# Altium PCB Motherboard_PCB.PcbDoc
Units mm, origin at the board's own origin, x right, y up, seen from the top; angles counter-clockwise.
Board outline 135 x 101.98 mm, 4 copper layers (Top Layer, Ground, Power, Bottom Layer), stack 0.603 mm thick; 12 components, 57 nets, 161 pads, 18 vias.
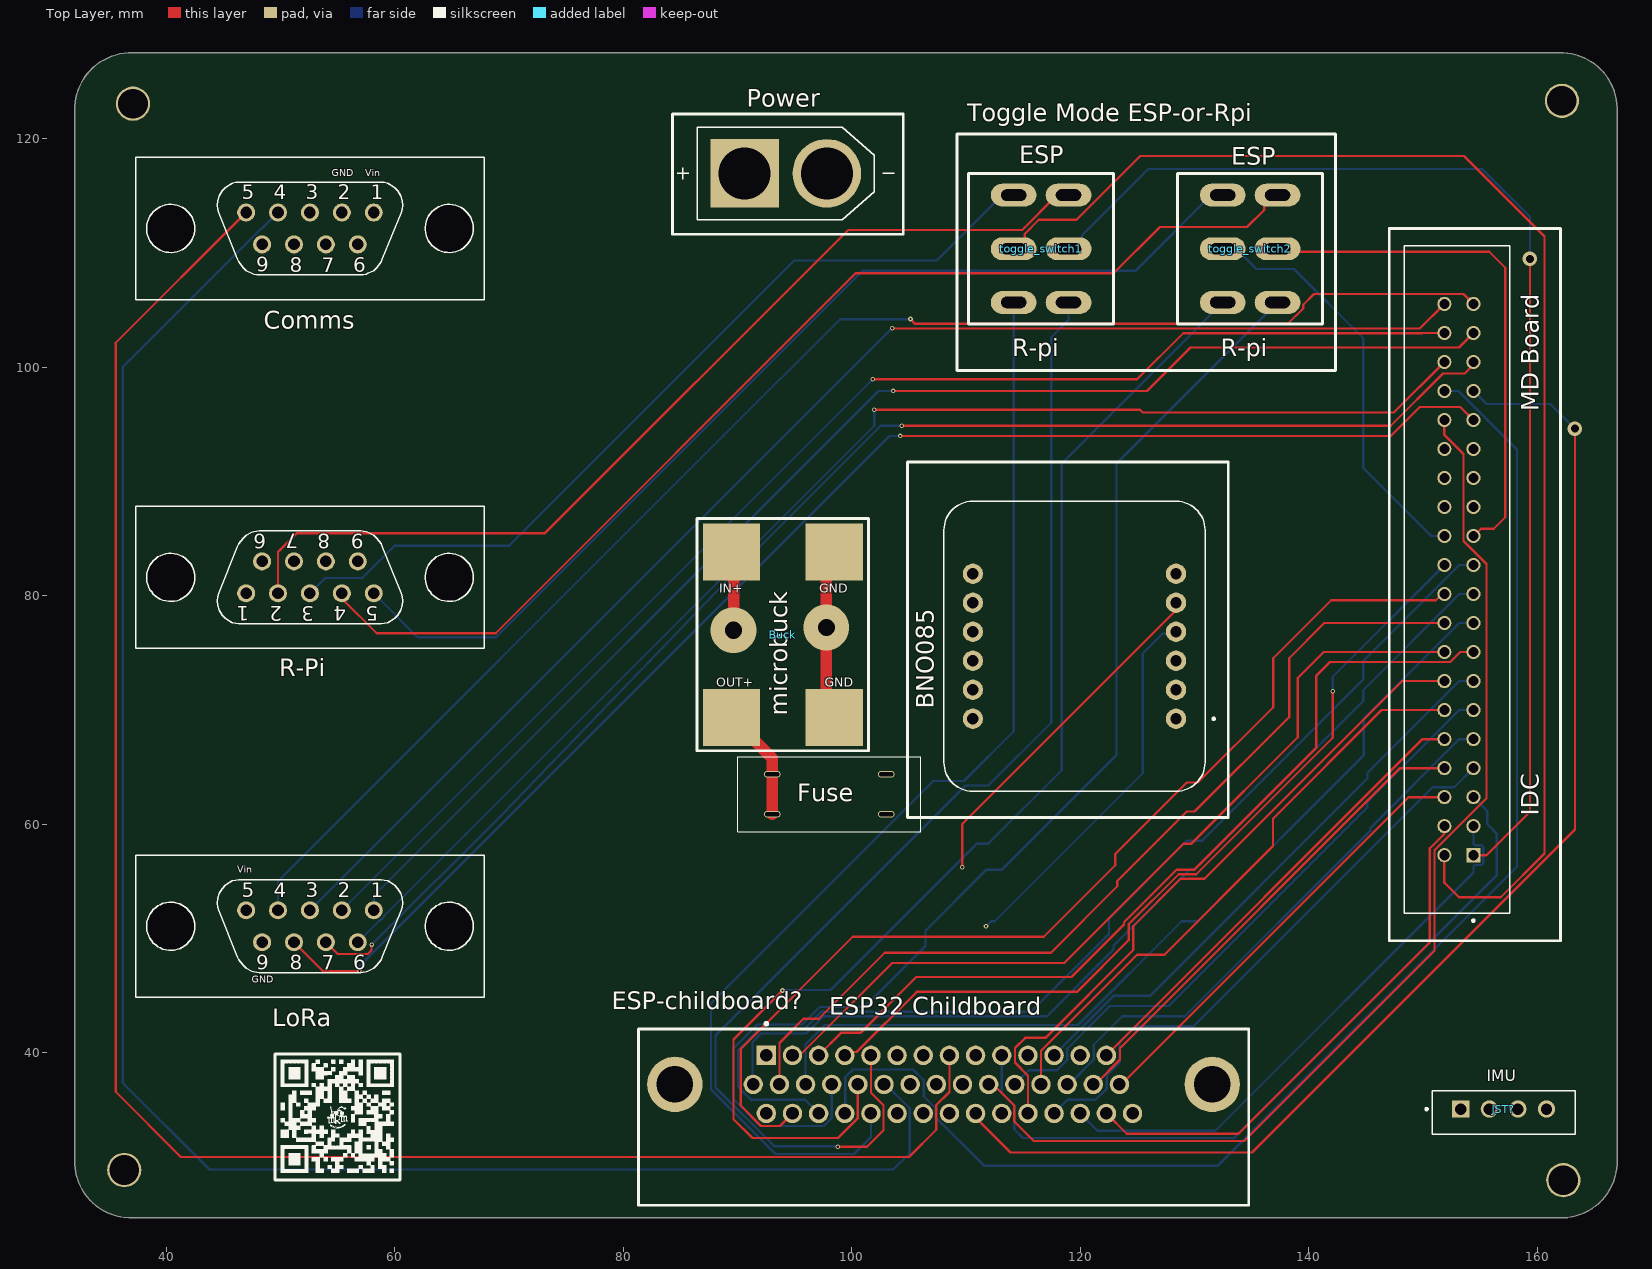
[diagram p0: Top Layer view]
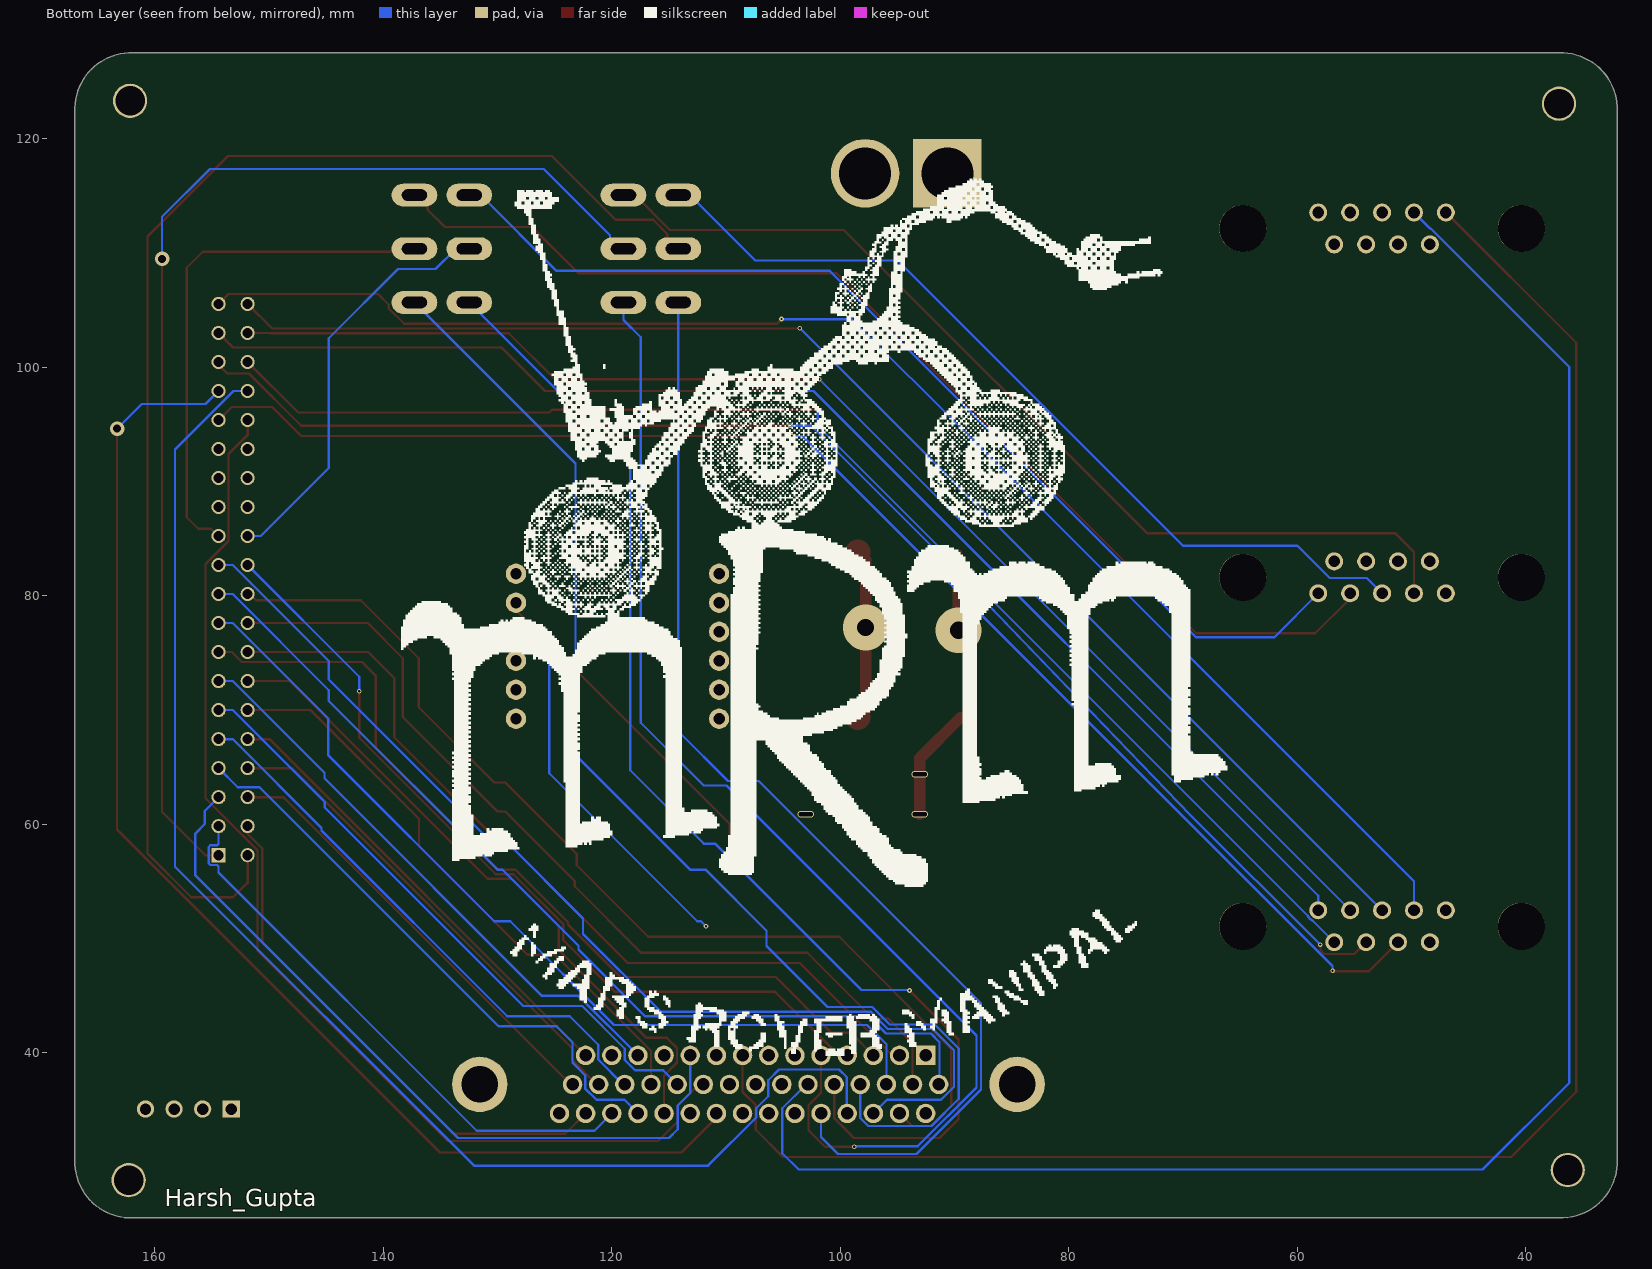
[diagram p1: Bottom Layer view, seen from below]
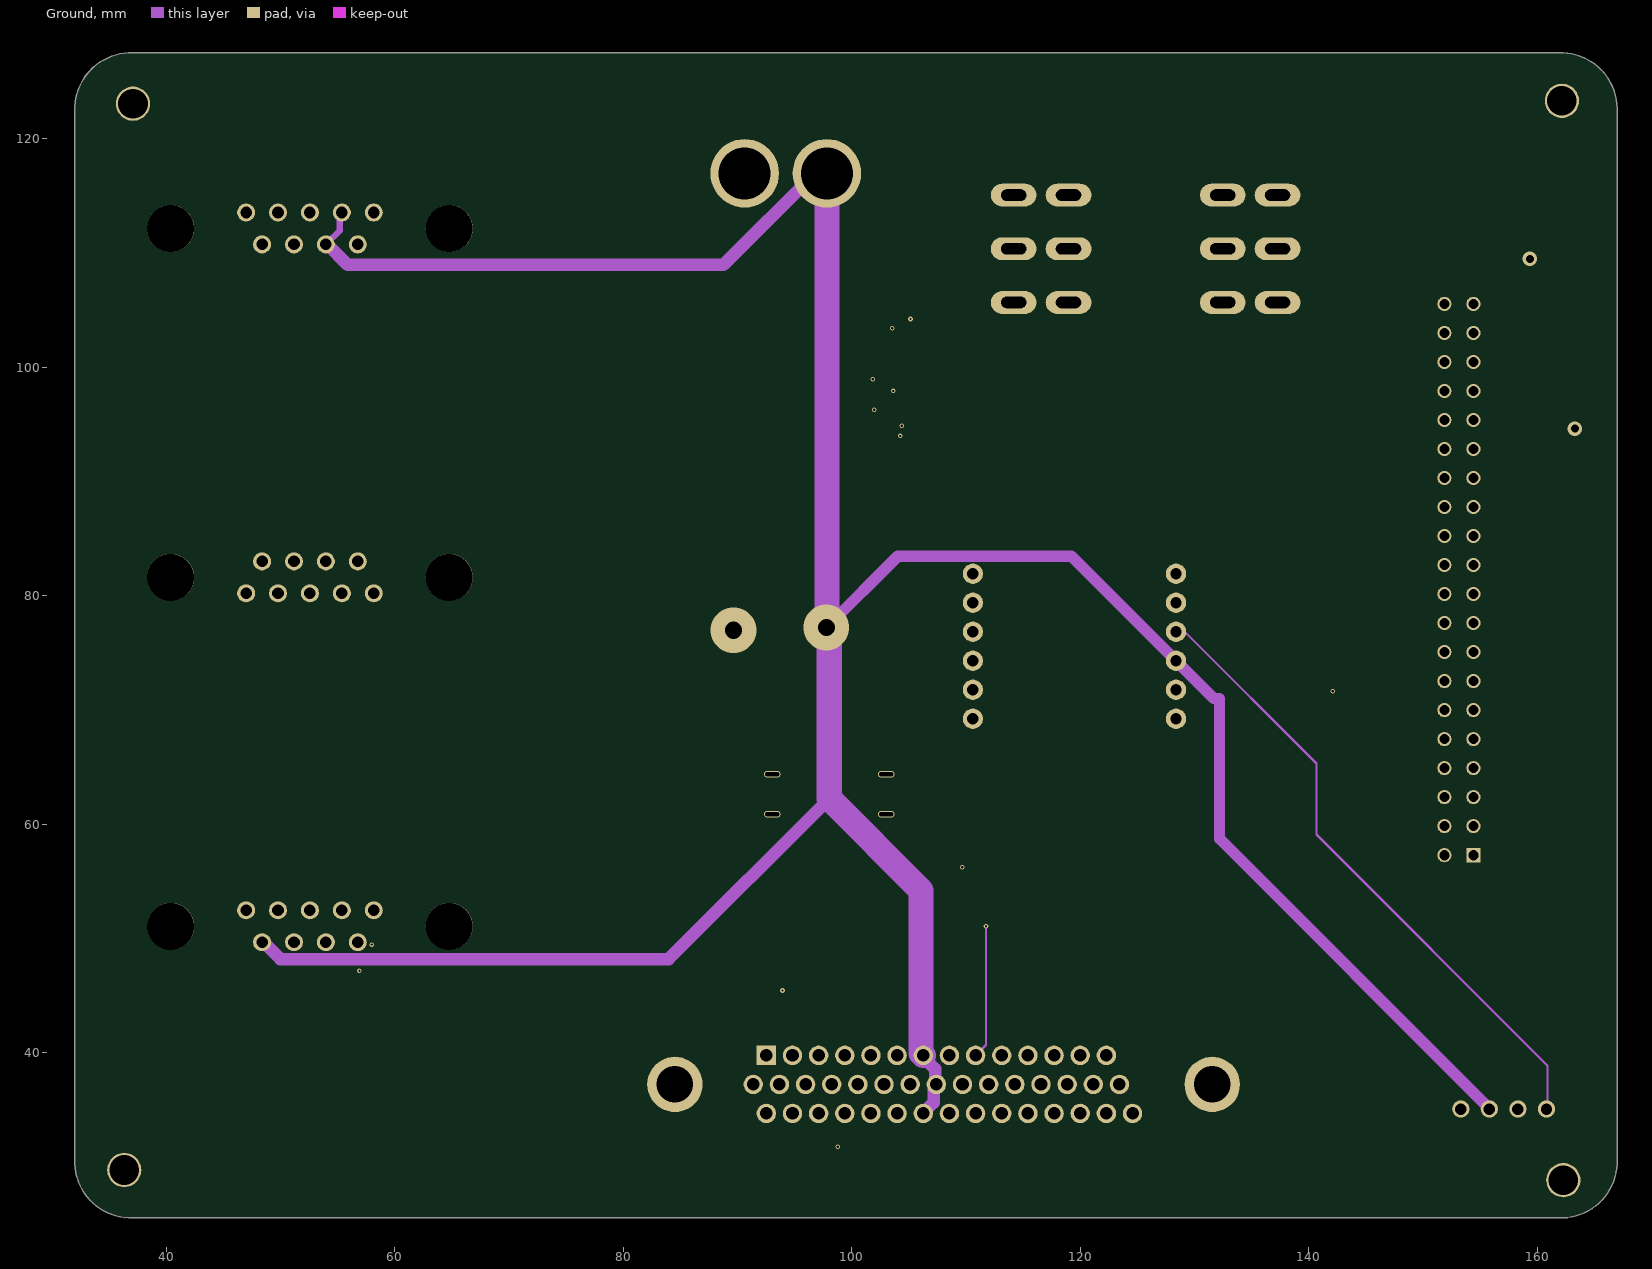
[diagram p2: Ground]
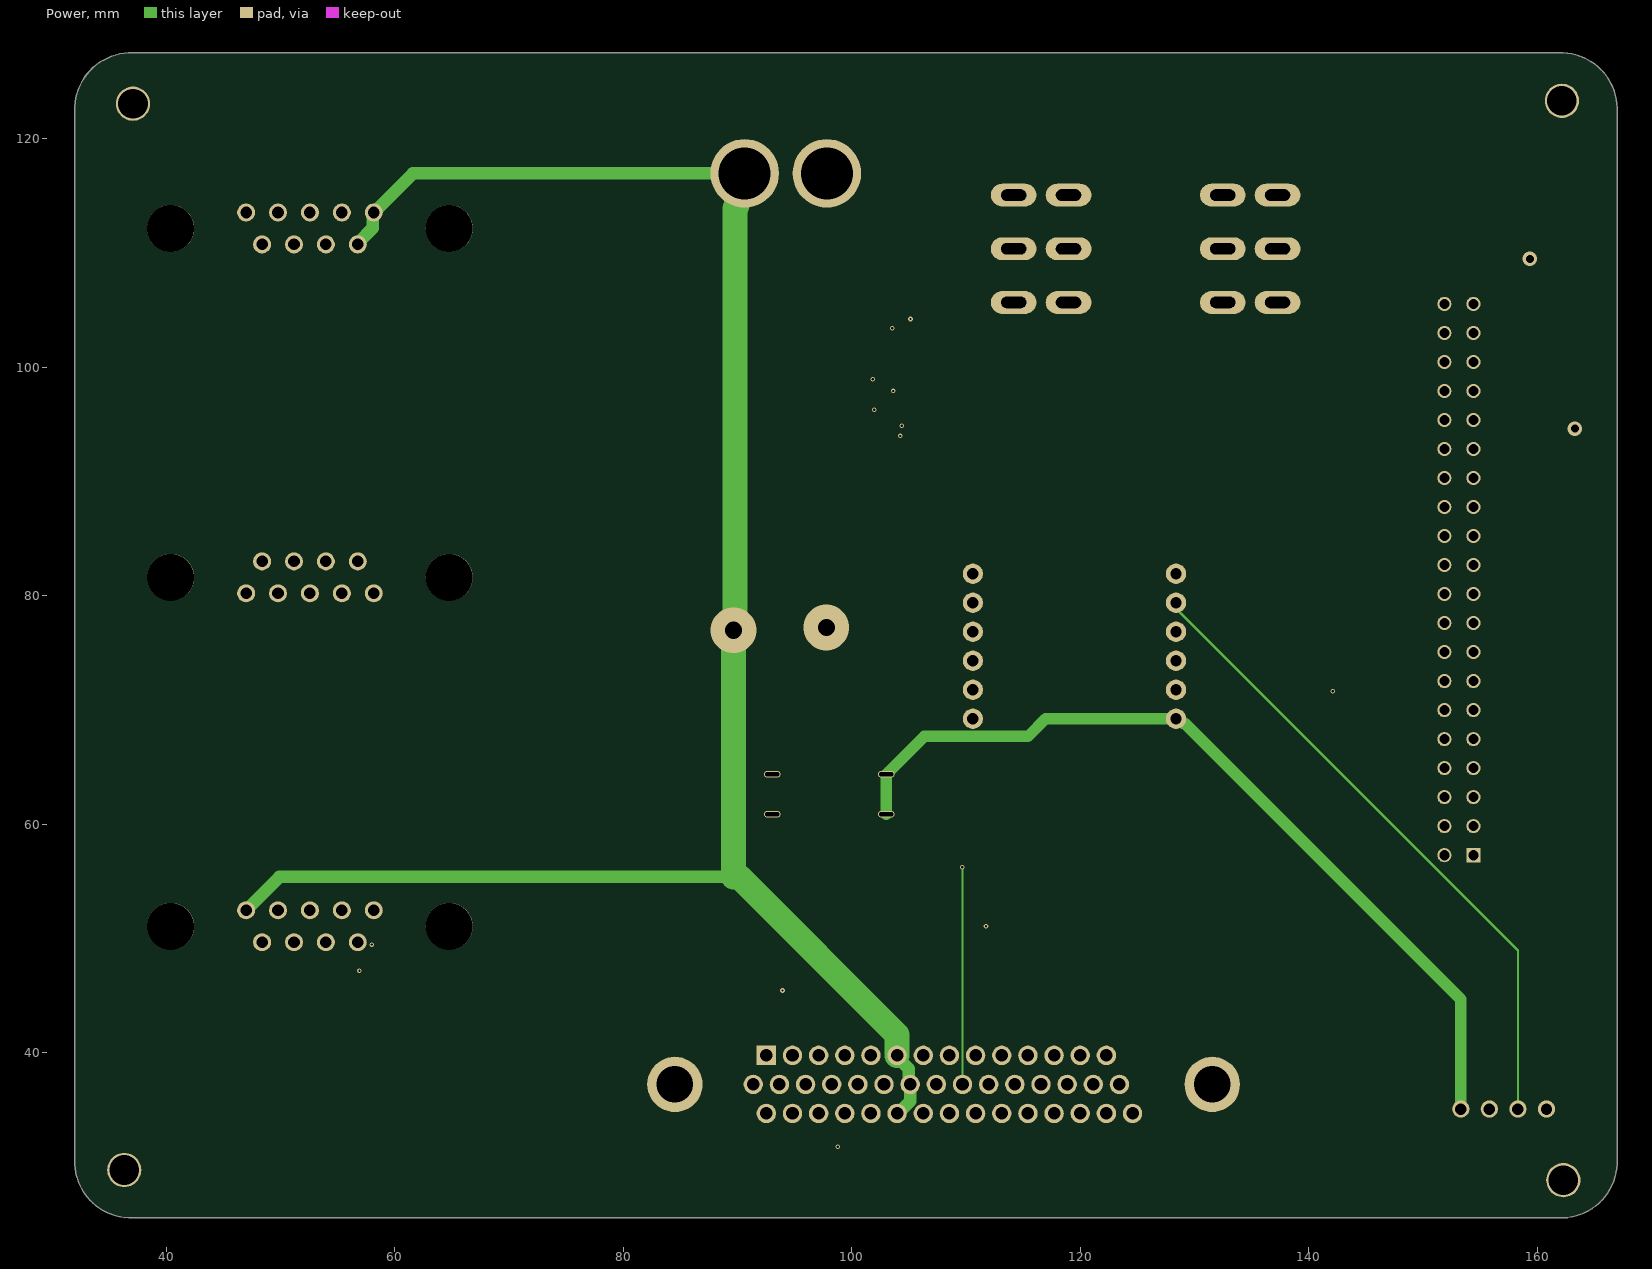
[diagram p3: Power]

## Layer stack, top to bottom
Top Solder: solder mask 0.0102, Solder Resist, Dk 3.5
Top Layer: signal copper 0.0356
Dielectric 2: prepreg 0.0711, PP-006, Dk 4.1
Ground: signal copper 0.035
Dielectric 1: dielectric 0.32, FR-4, Dk 4.8
Power: signal copper 0.035
Dielectric 3: prepreg 0.0711, PP-006, Dk 4.1
Bottom Layer: signal copper 0.0356
Bottom Solder: solder mask 0.0102, Solder Resist, Dk 3.5

## Board outline
32.004,30.228 ccw(c36.893,30.416) 36.708,25.527 36.711,25.527 161.931,25.527 162.309,25.527 ccw(c162.121,30.416) 167.009,30.194 167.005,30.226 167.005,122.422 167.005,122.682 167.007,122.708 ccw(c162.115,122.618) 162.301,127.508 37.084,127.508 37.078,127.508 ccw(c36.893,122.619) 32.004,122.807 32.004,30.607

## Design rules (kind name [scope] priority, off if disabled: settings)
Clearance [All] p1: gap=0.254 ignorepadtopadclearanceinfootprint=FALSE except(0.15: Arc-THPad Track-THPad; 0.2: Arc-Arc Arc-Track Arc-SMDPad Track-Track Track-SMDPad)
DiffPairsRouting [All] p1: maxlimit=0.254 minlimit=0.2 mostfreqgap=0.254 toplayer_minwidth=0.381 toplayer_maxwidth=0.381 toplayer_prefwidth=0.381 midlayer1_minwidth=0.381 midlayer1_maxwidth=0.381 midlayer1_prefwidth=0.381 midlayer2_minwidth=0.381 midlayer2_maxwidth=0.381 midlayer2_prefwidth=0.381 bottomlayer_minwidth=0.381 bottomlayer_maxwidth=0.381 bottomlayer_prefwidth=0.381 maxuncoupledlength=12.7
PolygonConnect [All] p1: connectstyle=Relief reliefconductorwidth=0.254 reliefentries=4 polygonreliefangle="90 Angle" airgapwidth=0.254
RoutingVias [All] p1: holewidth=0.711 width=1.27 viastyle="Through Hole" minholewidth=0.711 minwidth=1.27 maxholewidth=0.711 maxwidth=1.27
SolderMaskExpansion [All] p1: expansion=0.102 istentingtop=FALSE
SupplyNets "Schematic Supply Nets_1" [InNet('+12')] p1: voltage=0.000
SupplyNets "Schematic Supply Nets" [InNet('GND')] p2: voltage=0.000
Width [All] p1: maxlimit=4 minlimit=0.2 preferedwidth=0.254 toplayer_maxwidth=3 bottomlayer_maxwidth=0.3 minimp=50.000000 maximp=50.000000 favimp=50.000000
29 further rules are at their usual default settings.

## Components (designator, comment, footprint, x,y, rotation, side; value= is the part's Value field where it differs from the comment)
BNO085 "4754" MODULE_4754 119.507,75.565 r90 top
Buck "Microbuck" "Micro buck" 93.98,76.581 r0 top
Comms "DB9F" D-09F 52.578,112.141 r0 top
ESP-childboard? "L717HDB44PD1CH4F" PCBComponent_1 109.093,29.21 r0 top
Fuse "MicroBladeFuseHolder" Fuse 98.044,62.611 r90 top
IDC "3-1761603-3" TE_3-1761603-3 154.432,57.277 r90 top
JST? "IMU" JST_B4B-EH-A 157.079,35.052 r0 top
LoRa "DB9F" D-09F 52.578,51.054 r0 top
Power "XT60-M" AMASS_XT60-M 94.234,116.967 r0 top
R-Pi "DB9F" D-09F 52.578,81.597 r180 top
toggle_switch1 "toggle switch" "toggle switch" 116.586,110.363 r180 top
toggle_switch2 "toggle switch" "toggle switch" 134.887,110.363 r180 top

## Footprints (in the part's own frame and the unit in brackets; to place one, negate y for a bottom-side part, rotate by r counter-clockwise, add the part's x,y. Pads: shape width x height; smd on the part's side, far side on the other; paste and mask are expansions set on the pad)
AMASS_XT60-M [mm]
  round 6 hole 4.55: N(3.6,0)
  rect 6x6 / inner round 6 / far side rect 6x6 hole 4.55: P(-3.6,0)
  silkscreen extent -9.5,-4.05 9.5,4.05, body extent -7.75,-4.05 7.75,4.05, height 16
D-09F [mil]
  round 62 hole 40: 1(220,55) 2(110,55) 3(0,55) 4(-110,55) 5(-220,55) 6(165,-55) 7(55,-55) 8(-55,-55) 9(-165,-55)
  round 162 hole 162 unplated: ""(-480,0) ""(480,0)
  silkscreen extent -600,-245 600,245
Fuse [mm] "MicroBladeFuseHolder"
  oval 0.55x1.455 hole 0.35 slot 1.255 at 90 deg: 0(-1.75,4.988) 0(1.75,4.988) 1(-1.75,-4.988) 1(1.75,-4.988)
  silkscreen extent -3.27,-8 3.27,8
JST_B4B-EH-A [mm]
  rect 1.508x1.508 / inner round 1.508 / far side rect 1.508x1.508 hole 1: 1(-3.75,0)
  round 1.508 hole 1: 2(-1.25,0) 3(1.25,0) 4(3.75,0)
  silkscreen extent -6.85,-2.2 6.25,1.6, body extent -6.25,-2.2 6.25,1.6, height 6
"Micro buck" [mm]
  rect 5x5 smd: 1(-4.5,7.25) 2(4.5,7.25) 3(-4.5,-7.25) 4(4.5,-7.25)
  silkscreen extent -7.5,-10.16 7.5,10.16
MODULE_4754 [mil]
  round 70 hole 39.37: JP1_1(-250,-350) JP1_2(-150,-350) JP1_3(-50,-350) JP1_4(50,-350) JP1_5(150,-350) JP1_6(250,-350) JP2_1(-250,350) JP2_2(-150,350) JP2_3(-50,350) JP2_4(50,350) JP2_5(150,350) JP2_6(250,350)
  silkscreen extent -500,-483 500,450
PCBComponent_1 [mm]
  rect 1.7x1.7 hole 1.1 paste-2539.97 mask+0: 1(-16.562,10.541)
  round 1.7 hole 1.1 paste-2539.97 mask+0: 2(-14.272,10.541) 3(-11.982,10.541) 4(-9.692,10.541) 5(-7.402,10.541) 6(-5.112,10.541) 7(-2.822,10.541) 8(-0.532,10.541) 9(1.758,10.541) 10(4.048,10.541) 11(6.338,10.541) 12(8.628,10.541) 13(10.918,10.541) 14(13.208,10.541) 15(15.498,5.461) 16(-17.707,8.001) 17(-15.417,8.001) 18(-13.127,8.001) 19(-10.837,8.001) 20(-8.547,8.001) 21(-6.257,8.001) 22(-3.967,8.001) 23(-1.677,8.001) 24(0.613,8.001) 25(2.903,8.001) 26(5.193,8.001) 27(7.483,8.001) 28(9.773,8.001) 29(12.063,8.001) 30(14.353,8.001) 31(-16.562,5.461) 32(-14.272,5.461) 33(-11.982,5.461) 34(-9.692,5.461) 35(-7.402,5.461) 36(-5.112,5.461) 37(-2.822,5.461) 38(-0.532,5.461) 39(1.758,5.461) 40(4.048,5.461) 41(6.338,5.461) 42(8.628,5.461) 43(10.918,5.461) 44(13.208,5.461)
  round 4.85 hole 3.2 paste-2539.97 mask+0: 45(-24.562,8.001) 46(22.478,8.001)
  silkscreen extent -27.75,-2.58 25.67,13.44, body extent -27.85,-9.72 25.77,12.96, height 0.25
TE_3-1761603-3 [mm]
  rect 1.24x1.24 hole 0.89: 1(0,0)
  round 1.24 hole 0.89: 2(0,2.54) 3(2.54,0) 4(2.54,2.54) 5(5.08,0) 6(5.08,2.54) 7(7.62,0) 8(7.62,2.54) 9(10.16,0) 10(10.16,2.54) 11(12.7,0) 12(12.7,2.54) 13(15.24,0) 14(15.24,2.54) 15(17.78,0) 16(17.78,2.54) 17(20.32,0) 18(20.32,2.54) 19(22.86,0) 20(22.86,2.54) 21(25.4,0) 22(25.4,2.54) 23(27.94,0) 24(27.94,2.54) 25(30.48,0) 26(30.48,2.54) 27(33.02,0) 28(33.02,2.54) 29(35.56,0) 30(35.56,2.54) 31(38.1,0) 32(38.1,2.54) 33(40.64,0) 34(40.64,2.54) 35(43.18,0) 36(43.18,2.54) 37(45.72,0) 38(45.72,2.54) 39(48.26,0) 40(48.26,2.54)
  silkscreen extent -5.83,-3.18 53.34,6.04
"toggle switch" [mm]
  oval 4x2 hole 1 slot 2.2 at 0 deg: 1(-2.4,4.7) 2(-2.4,0) 3(-2.4,-4.7) 4(2.4,4.7) 5(2.4,0) 6(2.4,-4.7)
  silkscreen extent -6.35,-6.6 6.35,6.6

## Part data
BNO085: "Adafruit 9-DOF Orientation IMU Fusion Breakout - BNO085 (BNO080) - STEMMA QT / Qwiic", Package=None, Availability="In Stock", Check_prices=https://www.snapeda.com/parts/4754/Adafruit+Industries/view-part/?ref=eda, MF=Adafruit, MP=4754, Price=None, Purchase-URL=https://pricing.snapeda.com/search/part/4754/?ref=eda, SnapEDA_Link=https://www.snapeda.com/parts/4754/Adafruit+Industries/view-part/?ref=snap
Buck: library part microbuck
Comms LoRa R-Pi: "Adapter Connector D-Sub, 9 Pin Female To Modular, Female Jack, 8p8c _RJ45_ Beige", Package=None, Availability=Unavailable, MF="Assmann WSW", MP=DB9F, Price=None, SnapEDA_Link=https://www.snapeda.com/parts/DB9F/Assmann%20WSW%20Components/view-part/558712/?ref=snap
ESP-childboard?: library part CMP-02362-000001-1, "CONN DSUB HD PLUG 44POS R/A SLDR", Current Rating=3A, Max Operating Temperature=105°C, Min Operating Temperature=-55°C, Package Quantity=50, Voltage Rating=250V, Body Material=Steel, Connector Type=D-Sub, Contact Material=Brass, Contact Plating=Gold, Depth=22.22mm, Gender=Male, Housing Material=Thermoplastic, Length=53.09mm, Mount="Through Hole", Number of Contacts=44, Number of Ports=1, Number of Positions=44, Number of Rows=3, Number of Terminals=44, Orientation="Right Angle", Packaging=Tray, Termination=Solder, Width=12.55mm
IDC: "AMP-LATCH 40 Position 2.54 mm Dual Row Through-Hole Straight Pin Header", Package=None, Availability=Unavailable, Centerline_Pitch="2.54 mm[.1 in]", DigiKey-Purchase-URL=https://snapeda.com/shop?store=DigiKey&id=379325, EU_RoHS_Compliance=Compliant, MF="TE Connectivity", MP=3-1761603-3, Number_of_Positions=40, Price=None, Product_Type=Connector, SnapEDA_Link=https://www.snapeda.com/parts/3-1761603-3/TE%20Connectivity%20AMP%20Connectors/view-part/379325/?ref=snap
JST?: library part B4B-EH-A, "Connector Header Through Hole 4 position 0.098 (2.50mm)", Package=None, Check_prices=https://www.snapeda.com/parts/B4B-EH-A/JST/view-part/?ref=eda, MF=JST, MP=B4B-EH-A, SnapEDA_Link=https://www.snapeda.com/parts/B4B-EH-A/JST/view-part/?ref=snap
Power: "Plug; DC supply; XT60; male; PIN: 2; for cable; soldered; 30A; 500V", Package=Package, Check_prices=https://www.snapeda.com/parts/XT60-M/AMASS/view-part/?ref=eda, MF=AMASS, MP=XT60-M, SnapEDA_Link=https://www.snapeda.com/parts/XT60-M/AMASS/view-part/?ref=snap

## Free pads (board coordinates)
  round 3 hole 2.6: 1(162.306,28.829) 3(36.322,29.718) 3(37.084,123.063) 3(162.179,123.317)

## Via types
v1: diameter 0.4, hole 0.2, Top Layer to Bottom Layer, 14 vias
v2: diameter 4, hole 1.5, Top Layer to Bottom Layer, 2 vias
v3: diameter 1.27, hole 0.711, Top Layer to Bottom Layer, 2 vias

## Nets (pads, with @x,y where several pads share a name; then routed paths per layer and width w, separated by ;. In a path a pad name is that pad's centre, name@x,y a point inside that pad or via, vN(x,y) a via of type N, cw(c..) or ccw(c..) an arc to the next point about the centre after c; other vN are vias at no path point)
+12: Buck.1 Comms.1 Comms.6 ESP-childboard?.6 ESP-childboard?.22 ESP-childboard?.36 LoRa.5 Power.P | length 178.4
  Top Layer w0.3: Buck.1 Buck.1@90.17,83.141
  Top Layer w1: v2(89.662,76.962) 89.662,82.633 Buck.1@90.17,83.141
  Power w1.1: LoRa.5 49.911,55.372 90.17,55.372 ; Comms.6 56.769,110.872 58.075,112.179 58.075,113.447 Comms.1 61.595,116.967 Power.P ; ESP-childboard?.36 104.079,34.671 105.126,35.718 ESP-childboard?.22 105.011,37.326 105.011,38.558 103.981,39.589 ESP-childboard?.6
  Power w2.2: 89.662,55.372 v2(89.662,76.962) 89.789,77.089 89.789,113.905 89.907,114.023 89.907,116.24 Power.P ; 90.17,55.372 103.984,41.558 ESP-childboard?.6@103.984,39.754
GND: BNO085.JP1_3 Buck.2 Buck.4 Comms.2 Comms.7 ESP-childboard?.7 ESP-childboard?.23 ESP-childboard?.37 JST?.2 LoRa.9 Power.N | length 297.1
  Top Layer w1: Buck.4@98.453,69.358 97.79,70.021 v2(97.79,77.216) 97.79,83.141 Buck.2@98.453,83.804
  Top Layer w2.2: Buck.4@98.453,69.358 Buck.4 ; Buck.2@98.453,83.804 Buck.2
  Ground w0.55: Comms.7 55.176,111.945 55.176,113.342 Comms.2
  Ground w1: v2(97.79,77.216) 97.834,77.26 104.028,83.454 119.238,83.454 BNO085.JP1_3 131.699,70.993 132.207,70.993 132.207,58.725 155.829,35.103 JST?.2
  Ground w1.1: LoRa.9 48.515,49.657 50.003,48.17 83.984,48.17 98.044,62.23 ; Comms.7 54.103,110.744 55.881,108.966 88.773,108.966 96.774,116.967 Power.N ; ESP-childboard?.37 106.271,34.716 107.17,35.615 107.17,36.803 107.416,37.049 ESP-childboard?.23 107.301,37.326 107.301,38.558 106.271,39.589 ESP-childboard?.7
  Ground w2.2: v2(97.79,77.216) 98.044,76.962 98.044,62.23 106.081,54.193 106.081,39.941 ESP-childboard?.7 ; v2@97.834,77.26 Power.N
NetBNO085_JP1_1: BNO085.JP1_1 Fuse.1 JST?.1 | length 74.5
  Power w1: Fuse.1@103.032,60.861 Fuse.1@103.032,64.361 ; Fuse.1@103.26,64.586 106.35,67.676 115.442,67.676 116.981,69.215 BNO085.JP1_1 ; BNO085.JP1_1@128.997,68.826 129.167,68.826 153.329,44.664 JST?.1
NetBNO085_JP1_4: BNO085.JP1_4 ESP-childboard?.9 JST?.4 | length 101.5
  Ground w0.2: ESP-childboard?.9 111.76,40.66 v1(111.76,51.054) ; BNO085.JP1_4 129.159,76.835 140.694,65.3 140.694,59.077 160.922,38.849 160.922,35.145 JST?.4 ; JST?.4@160.744,34.952 JST?.4@160.815,35.023
  Bottom Layer w0.2: v1(111.76,51.054) 112.196,51.49 112.526,51.49 125.476,64.44 125.476,74.93 127.208,76.662 128.224,76.662 BNO085.JP1_4 ; BNO085.JP1_4@127.953,77.279 BNO085.JP1_4@128.318,77.645
NetBNO085_JP1_5: BNO085.JP1_5 ESP-childboard?.24 JST?.3 | length 106.7
  Top Layer w0.2: v1(109.689,56.222) 109.689,60.009 128.397,78.717 BNO085.JP1_5
  Power w0.2: ESP-childboard?.24 v1@109.706,56.239 ; BNO085.JP1_5 128.397,78.867 158.329,48.935 JST?.3
NetBuck_3: Buck.3 Fuse.0 | length 10
  Top Layer w1: Buck.3 93.056,65.754 Fuse.0@93.056,60.861
NetComms_4: Comms.4 ESP-childboard?.21 | length 161.5
  Bottom Layer w0.2: Comms.4 48.377,112.131 48.307,112.131 36.195,100.019 36.195,37.338 43.777,29.756 103.646,29.756 105.081,31.191 105.081,35.127 102.997,37.211 ESP-childboard?.21
NetComms_5: Comms.5 ESP-childboard?.8 | length 163.9
  Top Layer w0.2: Comms.5 35.58,102.128 35.58,36.556 41.275,30.861 105.029,30.861 107.417,33.249 107.417,35.408 108.561,36.552 ESP-childboard?.8
NetESP-childboard?_1: ESP-childboard?.1
NetESP-childboard?_2: ESP-childboard?.2 IDC.16 | length 74.7
  Top Layer w0.2: ESP-childboard?.2 95.458,39.751 103.545,47.839 118.618,47.839 129.068,58.289 129.75,58.289 139.065,67.604 139.065,72.794 141.328,75.057 IDC.16
NetESP-childboard?_3: ESP-childboard?.3 IDC.15 | length 76.1
  Top Layer w0.2: ESP-childboard?.3 99.079,41.719 100.774,41.719 105.664,46.609 119.253,46.609 123.848,51.204 123.848,51.395 128.463,56.011 130.012,56.011 140.663,66.663 140.663,72.972 141.878,74.187 152.406,74.187 153.276,75.057 IDC.15
  Bottom Layer w0.2: ESP-childboard?.3 ESP-childboard?.3@97.409,39.751
NetESP-childboard?_4: ESP-childboard?.4 IDC.22 | length 74.5
  Top Layer w0.2: ESP-childboard?.4 99.688,40.038 100.422,40.038 105.694,45.309 119.731,45.309 124.248,49.826 124.248,51.23 128.629,55.611 130.177,55.611 142.113,67.547 v1(142.113,71.628) ; IDC.22@151.611,82.677 IDC.22
  Bottom Layer w0.2: v1(142.113,71.628) 142.113,72.898 IDC.22
NetESP-childboard?_5: ESP-childboard?.5 toggle_switch1.1 | length 107.2
  Top Layer w0.2: v1(98.776,31.756) 101.352,31.756 102.791,33.195 102.791,35.385 101.691,36.485 ESP-childboard?.5
  Bottom Layer w0.2: v1@98.81,31.79 93.236,31.79 88.091,36.935 88.091,41.482 109.978,63.369 111.97,63.369 117.475,68.874 117.475,102.616 118.986,104.127 toggle_switch1.1
NetESP-childboard?_10: ESP-childboard?.10 IDC.5 | length 66.7
  Bottom Layer w0.2: ESP-childboard?.10 113.141,36.465 114.241,35.365 114.241,33.28 115.009,32.512 133.477,32.512 156.464,55.499 156.464,59.182 155.637,60.009 155.637,61.152 IDC.5
NetESP-childboard?_11: ESP-childboard?.11
NetESP-childboard?_12: ESP-childboard?.12 IDC.13 | length 50.6
  Bottom Layer w0.2: ESP-childboard?.12 122.928,44.958 126.111,44.958 145.169,64.016 145.169,64.485 153.202,72.517 IDC.13
NetESP-childboard?_13: ESP-childboard?.13
NetESP-childboard?_14: ESP-childboard?.14 IDC.10 | length 41.1
  Top Layer w0.2: ESP-childboard?.14 149.987,67.437 IDC.10
NetESP-childboard?_15: ESP-childboard?.15
NetESP-childboard?_16: ESP-childboard?.16 IDC.19 | length 84
  Top Layer w0.2: ESP-childboard?.16 ESP-childboard?.16@91.386,37.363
  Bottom Layer w0.2: ESP-childboard?.16 91.327,37.27 91.327,40.908 92.075,41.656 96.012,41.656 97.536,43.18 117.094,43.18 122.934,49.02 122.934,49.35 129.595,56.011 130.012,56.011 144.781,70.78 144.781,71.716 153.202,80.137 IDC.19
NetESP-childboard?_17: ESP-childboard?.17 IDC.18 | length 80.4
  Top Layer w0.2: ESP-childboard?.17 93.676,40.844 95.797,42.965 97.116,42.965 102.894,48.744 117.451,48.744 123.259,54.552 123.259,55.02 129.33,61.091 130.012,61.091 138.303,69.382 138.303,74.525 141.381,77.603 151.886,77.603 IDC.18
NetESP-childboard?_18: ESP-childboard?.18 IDC.17 | length 79.3
  Top Layer w0.2: ESP-childboard?.18 ESP-childboard?.18@96.127,37.211
  Bottom Layer w0.2: ESP-childboard?.18 95.966,40.721 97.663,42.418 119.822,42.418 128.894,51.49 130.306,51.49 144.821,66.005 144.821,69.216 153.202,77.597 IDC.17
NetESP-childboard?_19: ESP-childboard?.19 toggle_switch2.1 | length 107.8
  Top Layer w0.2: ESP-childboard?.19 ESP-childboard?.19@98.417,37.211
  Bottom Layer w0.2: ESP-childboard?.19 98.256,34.26 97.567,33.571 92.02,33.571 89.643,35.948 89.643,40.355 91.744,42.456 95.681,42.456 97.205,43.98 101.13,43.98 106.472,49.322 106.472,50.669 111.815,56.011 113.161,56.011 123.19,66.04 123.19,91.566 toggle_switch2.1
NetESP-childboard?_20: ESP-childboard?.20 toggle_switch2.4 | length 107.5
  Top Layer w0.2: v1(93.946,45.432) 89.662,41.148 89.662,34.163 91.313,32.512 98.798,32.512 100.546,34.26 ESP-childboard?.20
  Bottom Layer w0.2: v1(93.946,45.432) 93.98,45.466 98.15,45.466 110.973,58.289 111.97,58.289 118.39,64.709 118.39,91.566 toggle_switch2.4
NetESP-childboard?_25: ESP-childboard?.25 IDC.32 | length 98.7
  Top Layer w0.2: ESP-childboard?.25 112.395,37.211 114.241,35.365 114.241,33.968 115.951,32.258 134.366,32.258 151.022,48.914 151.022,57.717 155.575,62.27 155.575,82.764 153.562,84.777 153.562,92.397 151.892,94.067 IDC.32
NetESP-childboard?_26: ESP-childboard?.26 IDC.11 | length 55
  Top Layer w0.2: ESP-childboard?.26 ESP-childboard?.26@114.286,37.617
  Bottom Layer w0.2: ESP-childboard?.26 115.517,38.442 117.967,38.442 118.872,39.346 118.872,40.336 122.605,44.069 127.762,44.069 145.149,61.456 145.149,61.925 153.202,69.977 IDC.11
NetESP-childboard?_27: ESP-childboard?.27 IDC.12 | length 52
  Top Layer w0.2: ESP-childboard?.27 116.576,40.162 124.981,48.567 127.383,48.567 136.887,58.071 136.887,60.473 146.391,69.977 IDC.12
NetESP-childboard?_28: ESP-childboard?.28 IDC.9 | length 49
  Bottom Layer w0.2: ESP-childboard?.28 119.027,37.211 121.201,39.385 121.201,40.683 123.698,43.18 129.159,43.18 145.424,59.445 145.424,59.659 153.202,67.437 IDC.9
NetESP-childboard?_29: ESP-childboard?.29 IDC.8 | length 42.8
  Top Layer w0.2: ESP-childboard?.29 121.317,37.211 123.491,39.385 123.491,40.375 148.013,64.897 IDC.8
NetESP-childboard?_30: ESP-childboard?.30 IDC.6 | length 38.9
  Top Layer w0.2: ESP-childboard?.30 123.607,37.211 148.753,62.357 IDC.6
NetESP-childboard?_31: ESP-childboard?.31
NetESP-childboard?_32: ESP-childboard?.32 IDC.20 | length 91.9
  Top Layer w0.2: ESP-childboard?.32 93.721,33.571 92.075,33.571 90.286,35.36 90.286,40.316 100.106,50.135 116.81,50.135 123.07,56.395 123.07,57.371 129.33,63.631 130.306,63.631 136.906,70.231 136.906,74.521 141.986,79.601 151.126,79.601 151.662,80.137 IDC.20
NetESP-childboard?_33: ESP-childboard?.33 IDC.21 | length 94.9
  Bottom Layer w0.2: ESP-childboard?.33 95.925,35.857 91.185,35.857 90.043,36.998 90.043,40.19 91.909,42.056 95.846,42.056 97.37,43.58 115.716,43.58 122.523,50.387 122.523,51.744 129.33,58.551 130.687,58.551 144.789,72.653 144.789,74.265 153.202,82.677 IDC.21
NetESP-childboard?_34: ESP-childboard?.34 IDC.34 | length 122.9
  Bottom Layer w0.2: ESP-childboard?.34 99.441,34.711 99.441,37.846 100.115,38.52 105.372,38.52 106.316,37.577 106.316,36.182 107.371,35.127 107.371,34.305 111.577,30.099 132.08,30.099 158.242,56.261 158.242,92.797 153.122,97.917 IDC.34
NetESP-childboard?_35: ESP-childboard?.35 toggle_switch1.4 | length 100.5
  Bottom Layer w0.2: ESP-childboard?.35 101.691,32.603 100.203,31.115 93.345,31.115 87.691,36.769 87.691,44.319 107.141,63.769 109.83,63.769 114.186,68.125 toggle_switch1.4
NetESP-childboard?_38: ESP-childboard?.38
NetESP-childboard?_39: ESP-childboard?.39 IDC.33 | length 111.2
  Top Layer w0.2: ESP-childboard?.39 110.851,34.31 113.919,31.242 135.04,31.242 163.322,59.524 v3(163.322,94.615)
  Bottom Layer w0.2: IDC.33 155.575,96.774 161.163,96.774 v3(163.322,94.615)
NetESP-childboard?_40: ESP-childboard?.40
NetESP-childboard?_41: ESP-childboard?.41 IDC.14 | length 58.3
  Top Layer w0.2: ESP-childboard?.41 115.443,34.683 115.443,37.973 114.3,39.116 114.3,40.386 115.195,41.281 116.961,41.281 124.648,48.968 124.648,51.064 128.795,55.211 130.891,55.211 148.197,72.517 IDC.14
NetESP-childboard?_42: ESP-childboard?.42 IDC.7 | length 51
  Bottom Layer w0.2: ESP-childboard?.42 118.907,35.857 121.357,35.857 122.346,36.845 122.346,38.018 123.444,39.116 123.444,40.894 124.841,42.291 129.921,42.291 150.857,63.227 152.762,63.227 IDC.7
NetESP-childboard?_43: ESP-childboard?.43 IDC.3 | length 49.9
  Bottom Layer w0.2: ESP-childboard?.43 121.535,33.147 131.826,33.147 154.432,55.753 154.432,56.29 154.549,56.407 155.156,56.407 155.302,56.553 155.302,58.001 155.156,58.147 154.549,58.147 154.432,58.264 IDC.3
NetESP-childboard?_44: ESP-childboard?.44 IDC.4 | length 46.7
  Top Layer w0.2: ESP-childboard?.44 124.079,32.893 125.957,32.893 133.858,32.893 150.622,49.657 150.622,57.882 151.892,59.152 IDC.4
NetIDC_1: IDC.1 toggle_switch1.2 | length 103.8
  Top Layer w0.2: IDC.1 155.575,57.277 159.385,61.087 v3(159.385,109.474)
  Bottom Layer w0.2: toggle_switch1.2 119.337,110.363 120.169,111.194 120.169,111.546 125.971,117.348 155.194,117.348 159.385,113.157 v3(159.385,109.474)
NetIDC_2: IDC.2 toggle_switch1.5 | length 120.3
  Top Layer w0.2: toggle_switch1.5 114.318,110.363 115.15,111.194 115.15,111.663 116.39,112.903 119.002,112.903 119.678,112.903 125.266,118.491 153.611,118.491 160.655,111.447 160.655,57.423 156.826,53.594 153.162,53.594 151.892,54.864 IDC.2
NetIDC_23: IDC.23 toggle_switch2.2 | length 46.9
  Top Layer w0.2: toggle_switch2.2 137.541,110.109 155.829,110.109 157.226,108.712 157.226,86.868 156.206,85.848 155.102,85.848 154.471,85.217 IDC.23
  Bottom Layer w0.2: toggle_switch2.2@136.95,110.871 toggle_switch2.2@137.95,110.871
NetIDC_24: IDC.24 toggle_switch2.5 | length 36.5
  Top Layer w0.2: toggle_switch2.5 toggle_switch2.5@133.658,110.363
  Bottom Layer w0.2: toggle_switch2.5@133.658,110.363 135.436,108.585 138.728,108.585 144.785,102.528 144.785,91.181 150.749,85.217 IDC.24
NetIDC_31: IDC.31 LoRa.8 | length 125.7
  Top Layer w0.2: LoRa.8 53.721,47.117 56.721,47.117 56.731,47.127 56.901,47.127 56.911,47.117 56.921,47.127 57.091,47.127 v1@57.101,47.117 ; v1(104.267,93.98) 147.193,93.98 149.733,96.52 153.289,96.52 IDC.31
  Bottom Layer w0.2: v1(56.911,47.166) 56.911,47.582 103.309,93.98 v1(104.267,93.98)
NetIDC_35: IDC.35 LoRa.7 | length 123
  Top Layer w0.2: LoRa.7 55.012,48.62 57.64,48.62 57.968,48.947 57.968,49.423 v1(57.993,49.447) ; v1(104.394,94.869) 147.193,94.869 151.765,99.441 153.67,99.441 154.432,100.203 IDC.35
  Bottom Layer w0.2: v1(57.993,49.447) 69.302,60.728 69.304,60.73 91.471,83.791 102.243,94.565 102.547,94.869 v1(104.394,94.869)
NetIDC_36: IDC.36 LoRa.6 | length 117.3
  Top Layer w0.2: LoRa.6 LoRa.6@56.839,49.657 ; v1(101.981,96.266) 125.24,96.266 125.475,96.031 147.466,96.031 IDC.36
  Bottom Layer w0.2: LoRa.6 58.64,51.528 ccw(c58.166,52.451) 59.089,51.977 66.167,59.055 101.981,94.869 v1(101.981,96.266)
NetIDC_37: IDC.37 LoRa.1 | length 117.9
  Top Layer w0.2: v1(103.632,97.917) 125.857,97.917 129.667,101.727 153.162,101.727 IDC.37
  Bottom Layer w0.2: LoRa.1 58.166,53.721 102.362,97.917 v1(103.632,97.917)
NetIDC_38: IDC.38 LoRa.2 | length 117.5
  Top Layer w0.2: v1(101.854,98.933) 124.986,98.933 129.031,102.978 149.899,102.978 149.918,102.997 IDC.38
  Bottom Layer w0.2: LoRa.2 v1(101.854,98.933)
NetIDC_39: IDC.39 LoRa.4 | length 129.4
  Top Layer w0.2: v1(105.156,104.213) 105.393,103.976 105.393,103.938 105.535,103.797 138.189,103.797 139.537,105.145 139.537,105.468 140.476,106.407 153.562,106.407 IDC.39
  Bottom Layer w0.2: LoRa.4 49.784,54.908 49.784,54.991 88.761,93.992 cw(c89.789,92.964) 88.763,93.994 98.997,104.204 105.147,104.204 v1(105.156,104.213)
NetIDC_40: IDC.40 LoRa.3 | length 121.2
  Top Layer w0.2: v1@103.595,103.378 149.733,103.378 IDC.40
  Bottom Layer w0.2: LoRa.3 v1@103.524,103.397
  other v1: 103.56,103.413
NetR-Pi_2: R-Pi.2 toggle_switch1.3 | length 85.8
  Top Layer w0.2: R-Pi.2 49.784,83.82 51.435,85.471 73.152,85.471 99.695,112.014 114.935,112.014 117.984,115.063 toggle_switch1.3
NetR-Pi_3: R-Pi.3 toggle_switch1.6 | length 76
  Bottom Layer w0.2: R-Pi.3 53.911,81.534 57.15,81.534 59.976,84.36 70.009,84.36 94.979,109.33 107.453,109.33 113.186,115.063 toggle_switch1.6
NetR-Pi_4: R-Pi.4 toggle_switch2.3 | length 100.2
  Top Layer w0.2: R-Pi.4@55.372,80.662 55.372,79.756 58.42,76.708 68.834,76.708 100.359,108.233 122.956,108.233 126.991,112.268 134.62,112.268 136.115,113.763 136.115,114.232 136.946,115.063 toggle_switch2.3
NetR-Pi_5: R-Pi.5 toggle_switch2.6 | length 92
  Bottom Layer w0.2: R-Pi.5 62.024,76.343 68.85,76.343 100.935,108.428 124.852,108.428 131.487,115.063 toggle_switch2.6
pads on no net: BNO085.JP1_2 BNO085.JP1_6 BNO085.JP2_1 BNO085.JP2_2 BNO085.JP2_3 BNO085.JP2_4 BNO085.JP2_5 BNO085.JP2_6 Comms. Comms.3 Comms.8 Comms.9 ESP-childboard?.45 ESP-childboard?.46 IDC.25 IDC.26 IDC.27 IDC.28 IDC.29 IDC.30 LoRa. R-Pi. R-Pi.1 R-Pi.6 R-Pi.7 R-Pi.8 R-Pi.9

## Silkscreen, mask and mechanical layers (free items; w line width, h text height)
Top Overlay:
  drawing of 91 lines, arcs and shapes, not listed
  text "Toggle Mode ESP-or-Rpi" at 110.109,121.539 h1.52
  text "ESP" at 114.681,117.856 h1.52
  text "ESP" at 133.223,117.729 h1.52
  text "GND" at 54.483,116.713 h0.6
  text "Vin" at 57.404,116.713 h0.6
  text "R-pi" at 114.046,100.965 h1.52
  text "R-pi" at 132.334,100.965 h1.52
  text "MD Board" at 160.147,96.139 h1.52 r90
  text "IN+" at 88.392,80.264 h0.8
  text "GND" at 97.155,80.264 h0.8
  text "OUT+" at 88.138,72.009 h0.8
  text "GND" at 97.663,72.009 h0.8
  text "microbuck" at 94.361,69.469 h1.52 r90
  text "Vin" at 46.228,55.753 h0.6
  text "GND" at 47.498,46.101 h0.6
  text "ESP32 Childboard" at 98.044,43.307 h1.52
Bottom Overlay:
  drawing of 61 lines, arcs and shapes, not listed
  text "Harsh_Gupta" at 159.131,26.535 h1.5
Mechanical 1:
  lines w0.254: 31.877,30.099 31.877,123.063 ; 31.877,30.607 ccw(c36.893,30.416) 36.703,25.4 ; 31.877,122.809 cw(c36.893,122.619) 37.084,127.635 162.433,127.635 ; 36.322,25.4 162.433,25.4 ; 161.931,25.4 ccw(c162.121,30.416) 167.138,30.226 ; 162.306,127.635 cw(c162.115,122.618) 167.132,122.428 ; 167.132,30.226 167.132,122.682

## Text inside footprints (layer, text, board x,y; h text height)
Comms: Top Overlay "1" at 57.913,114.681 h1.27; Top Overlay "2" at 54.995,114.685 h1.27; Top Overlay "3" at 52.197,114.684 h1.27; Top Overlay "4" at 49.398,114.685 h1.27; Top Overlay "5" at 46.604,114.683 h1.27; Top Overlay "6" at 56.391,108.328 h1.27; Top Overlay "7" at 53.595,108.329 h1.27; Top Overlay "8" at 50.798,108.328 h1.27; Top Overlay "9" at 47.879,108.331 h1.27
LoRa: Top Overlay "1" at 57.913,53.594 h1.27; Top Overlay "2" at 54.995,53.598 h1.27; Top Overlay "3" at 52.197,53.597 h1.27; Top Overlay "4" at 49.398,53.598 h1.27; Top Overlay "5" at 46.604,53.596 h1.27; Top Overlay "6" at 56.391,47.241 h1.27; Top Overlay "7" at 53.595,47.242 h1.27; Top Overlay "8" at 50.798,47.241 h1.27; Top Overlay "9" at 47.879,47.244 h1.27
R-Pi: Top Overlay "1" at 47.243,79.057 h1.27 r180; Top Overlay "2" at 50.161,79.053 h1.27 r180; Top Overlay "3" at 52.959,79.055 h1.27 r180; Top Overlay "4" at 55.758,79.053 h1.27 r180; Top Overlay "5" at 58.552,79.056 h1.27 r180; Top Overlay "6" at 48.765,85.411 h1.27 r180; Top Overlay "7" at 51.561,85.409 h1.27 r180; Top Overlay "8" at 54.358,85.411 h1.27 r180; Top Overlay "9" at 57.277,85.408 h1.27 r180